# Altium PCB LED_Cube.PcbDoc (part 1 of 2)
Units mil, origin at the board's own origin, x right, y up, seen from the top; angles counter-clockwise.
Board outline 3937.01 x 3149.61 mil, 4 copper layers (Top Layer, Layer 1, Layer 2, Bottom Layer), stack 61.811 mil thick; 84 components, 132 nets, 410 pads, 91 vias.
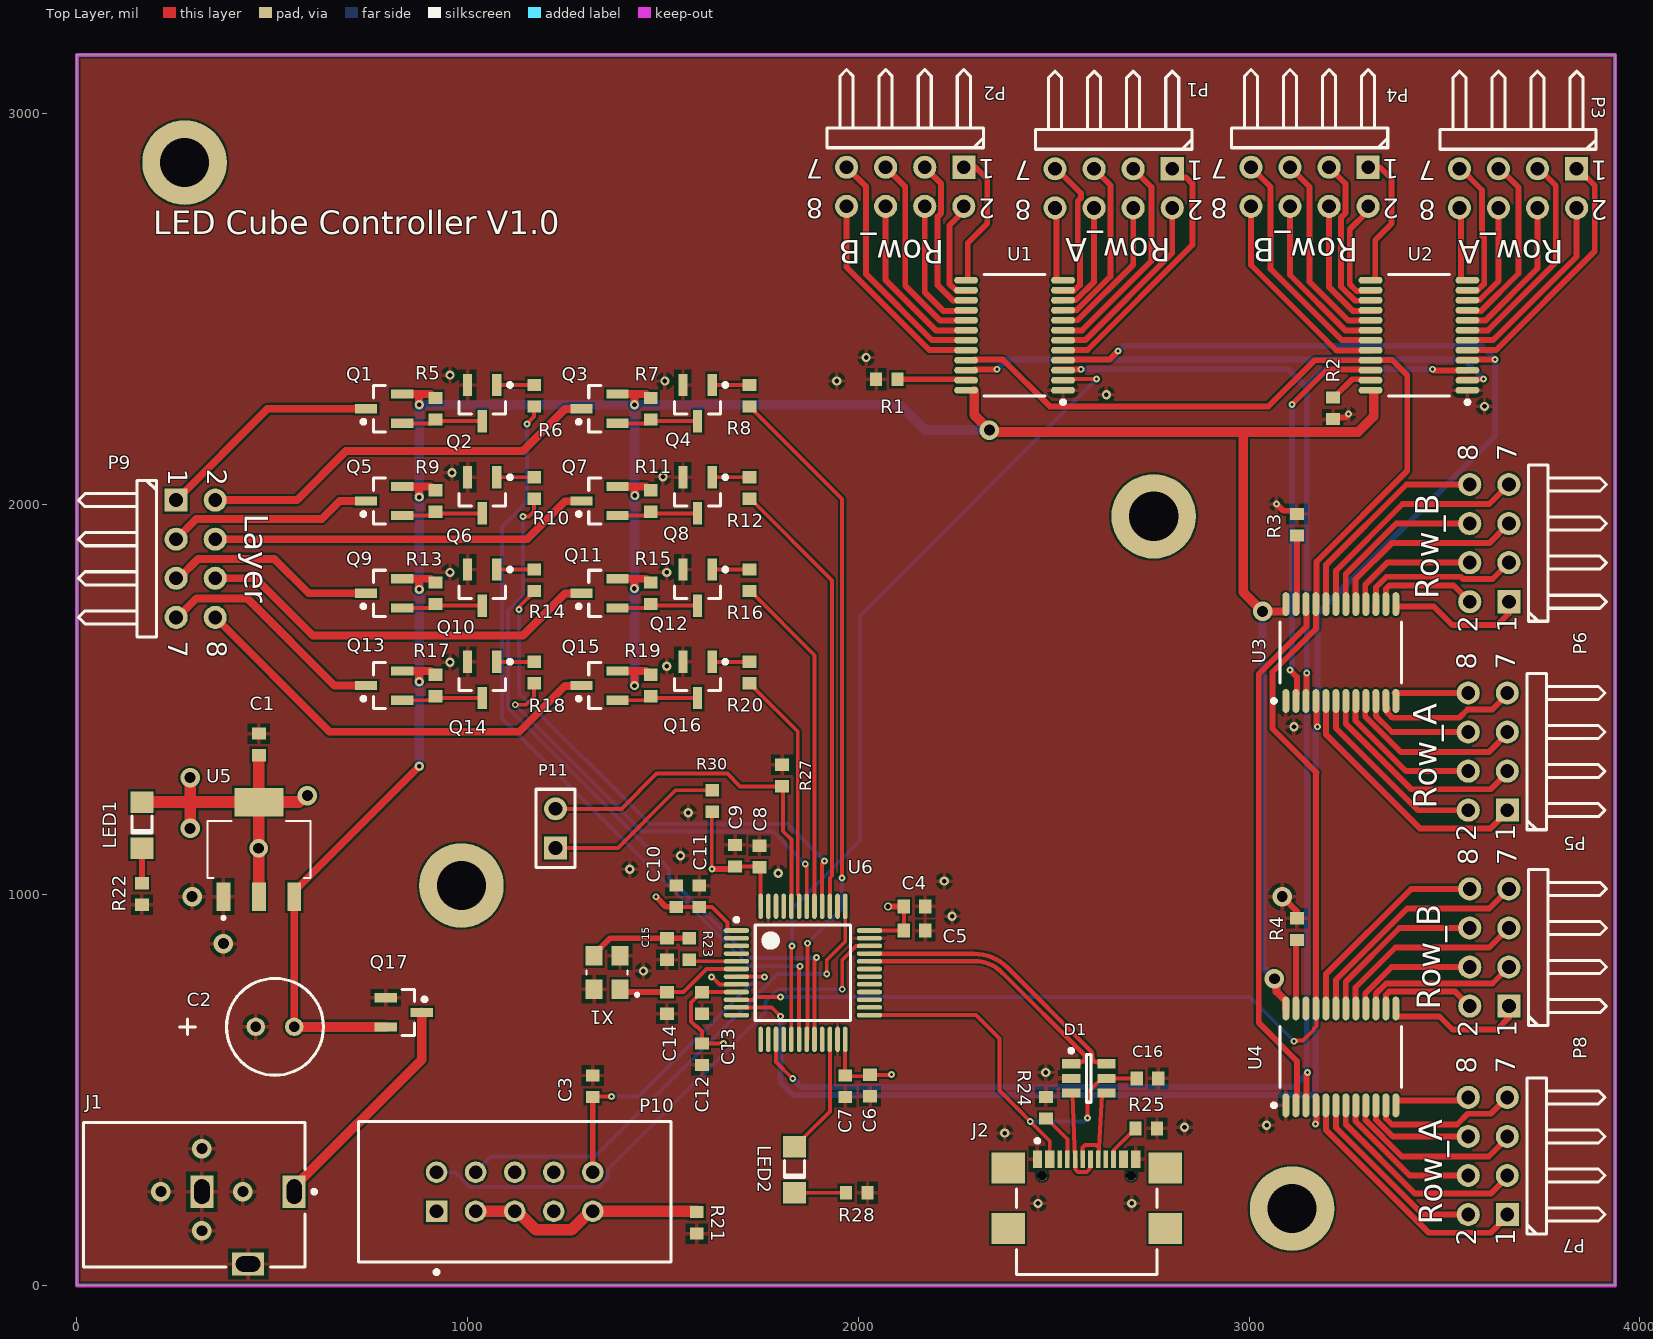
[diagram p0: Top Layer view]
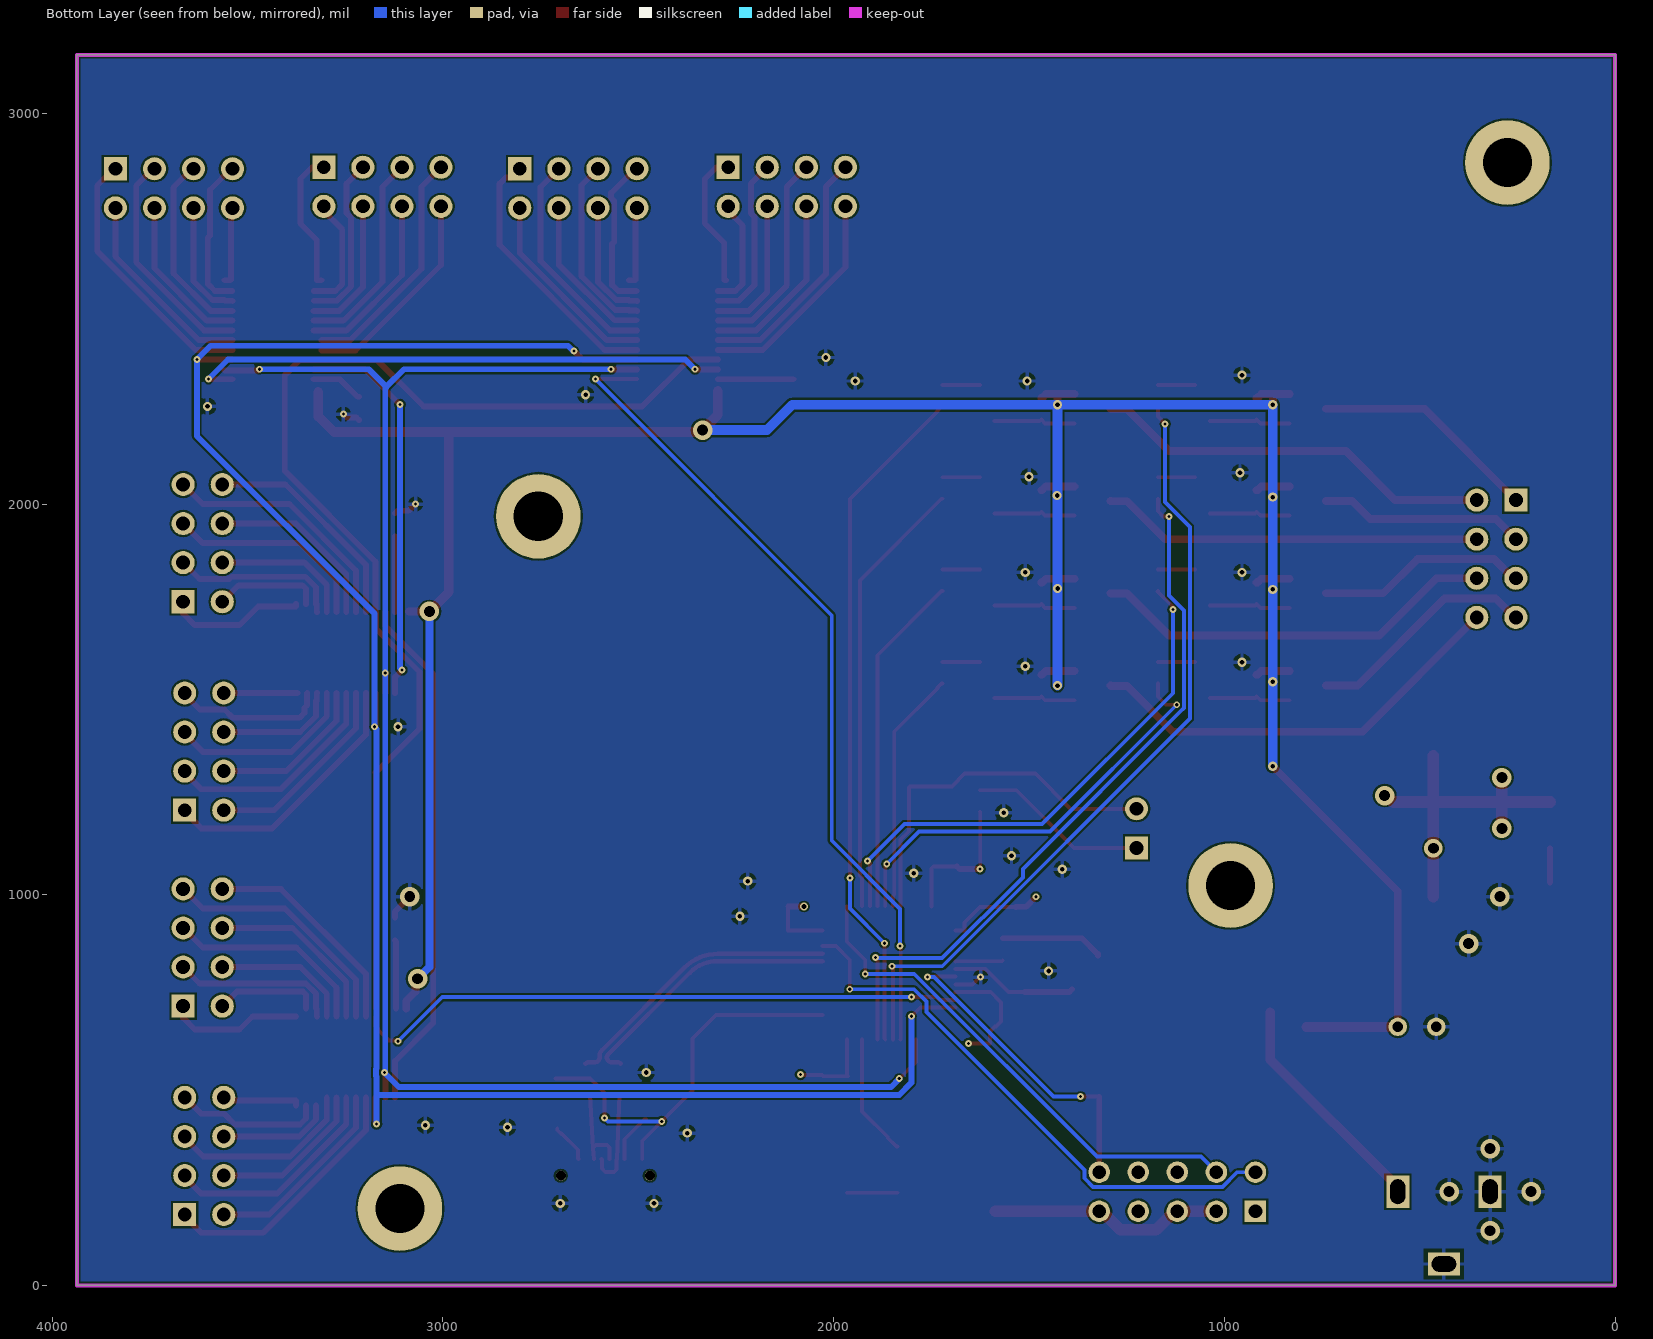
[diagram p1: Bottom Layer view, seen from below]
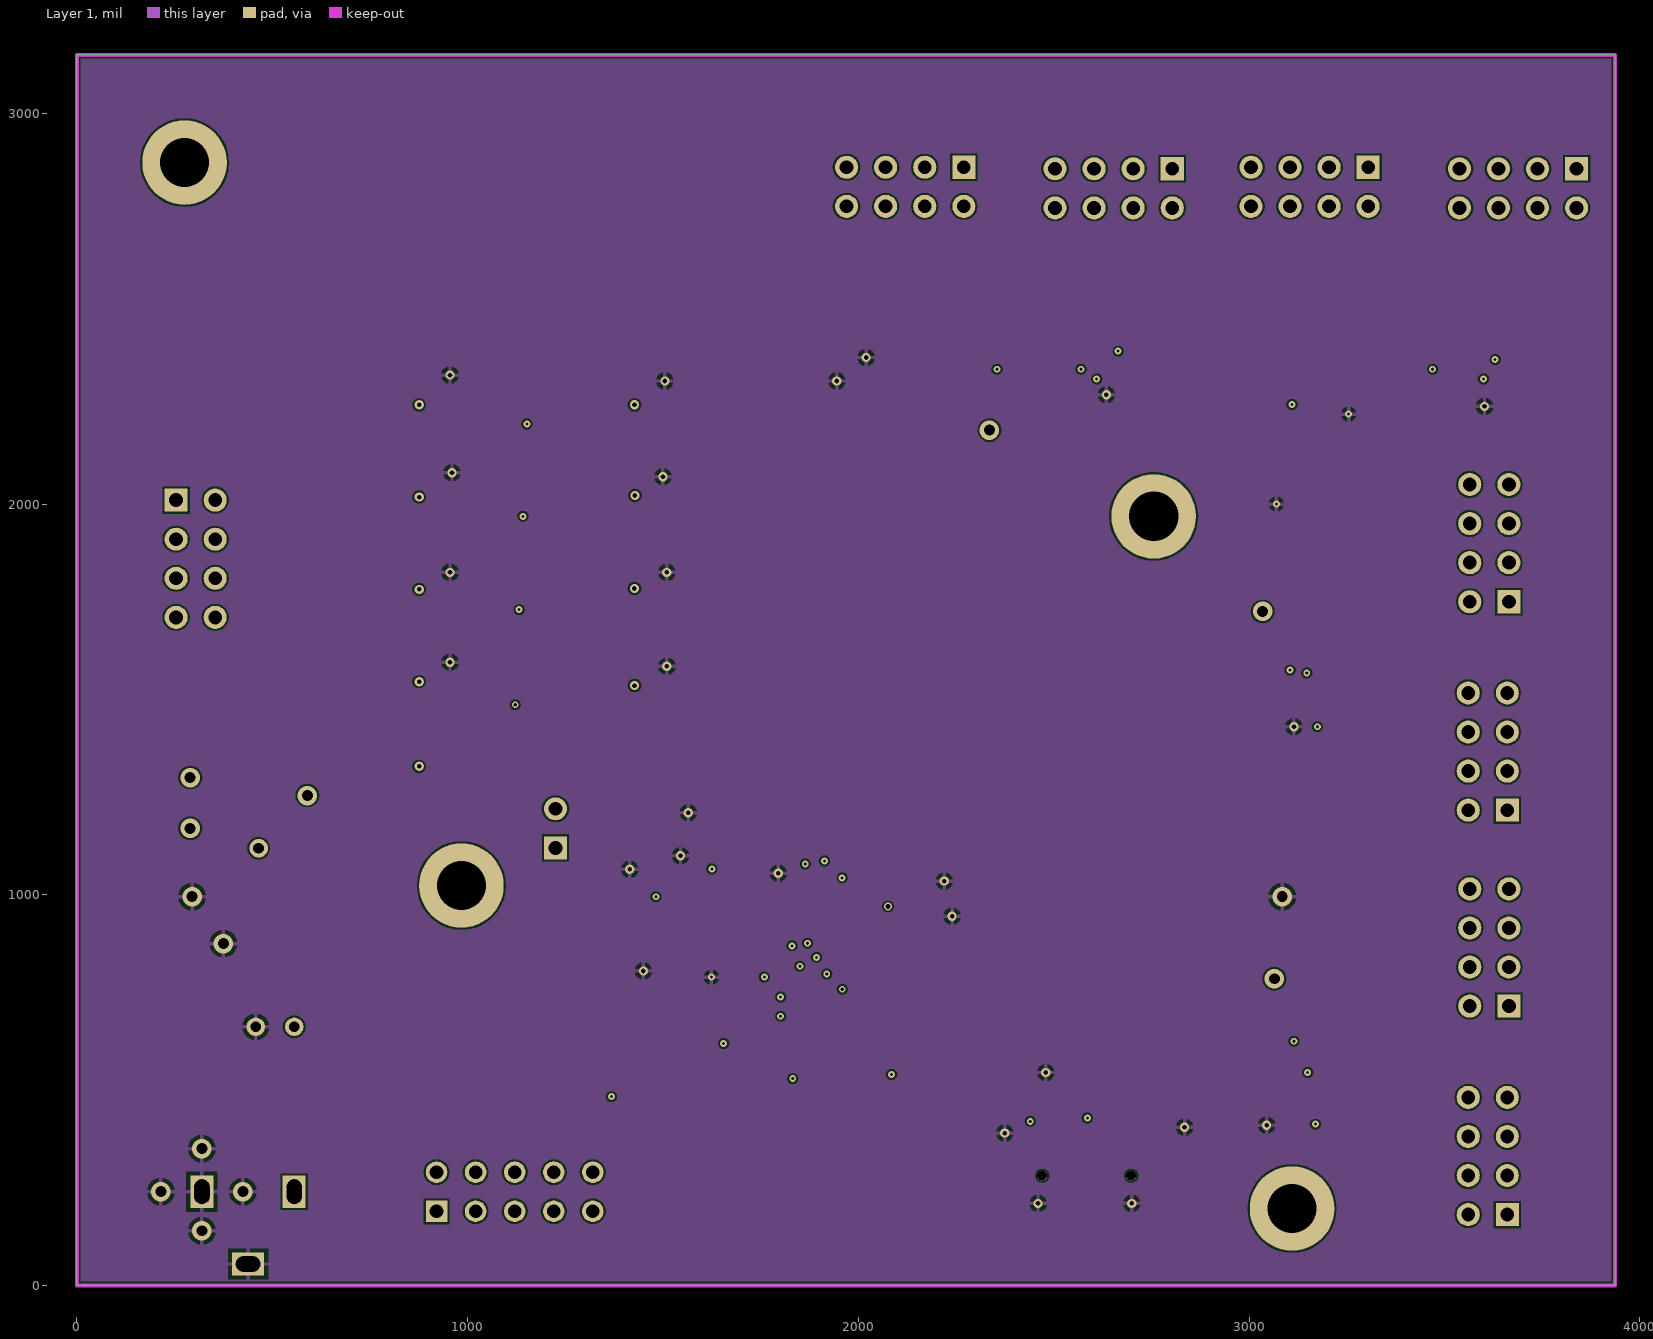
[diagram p2: Layer 1]
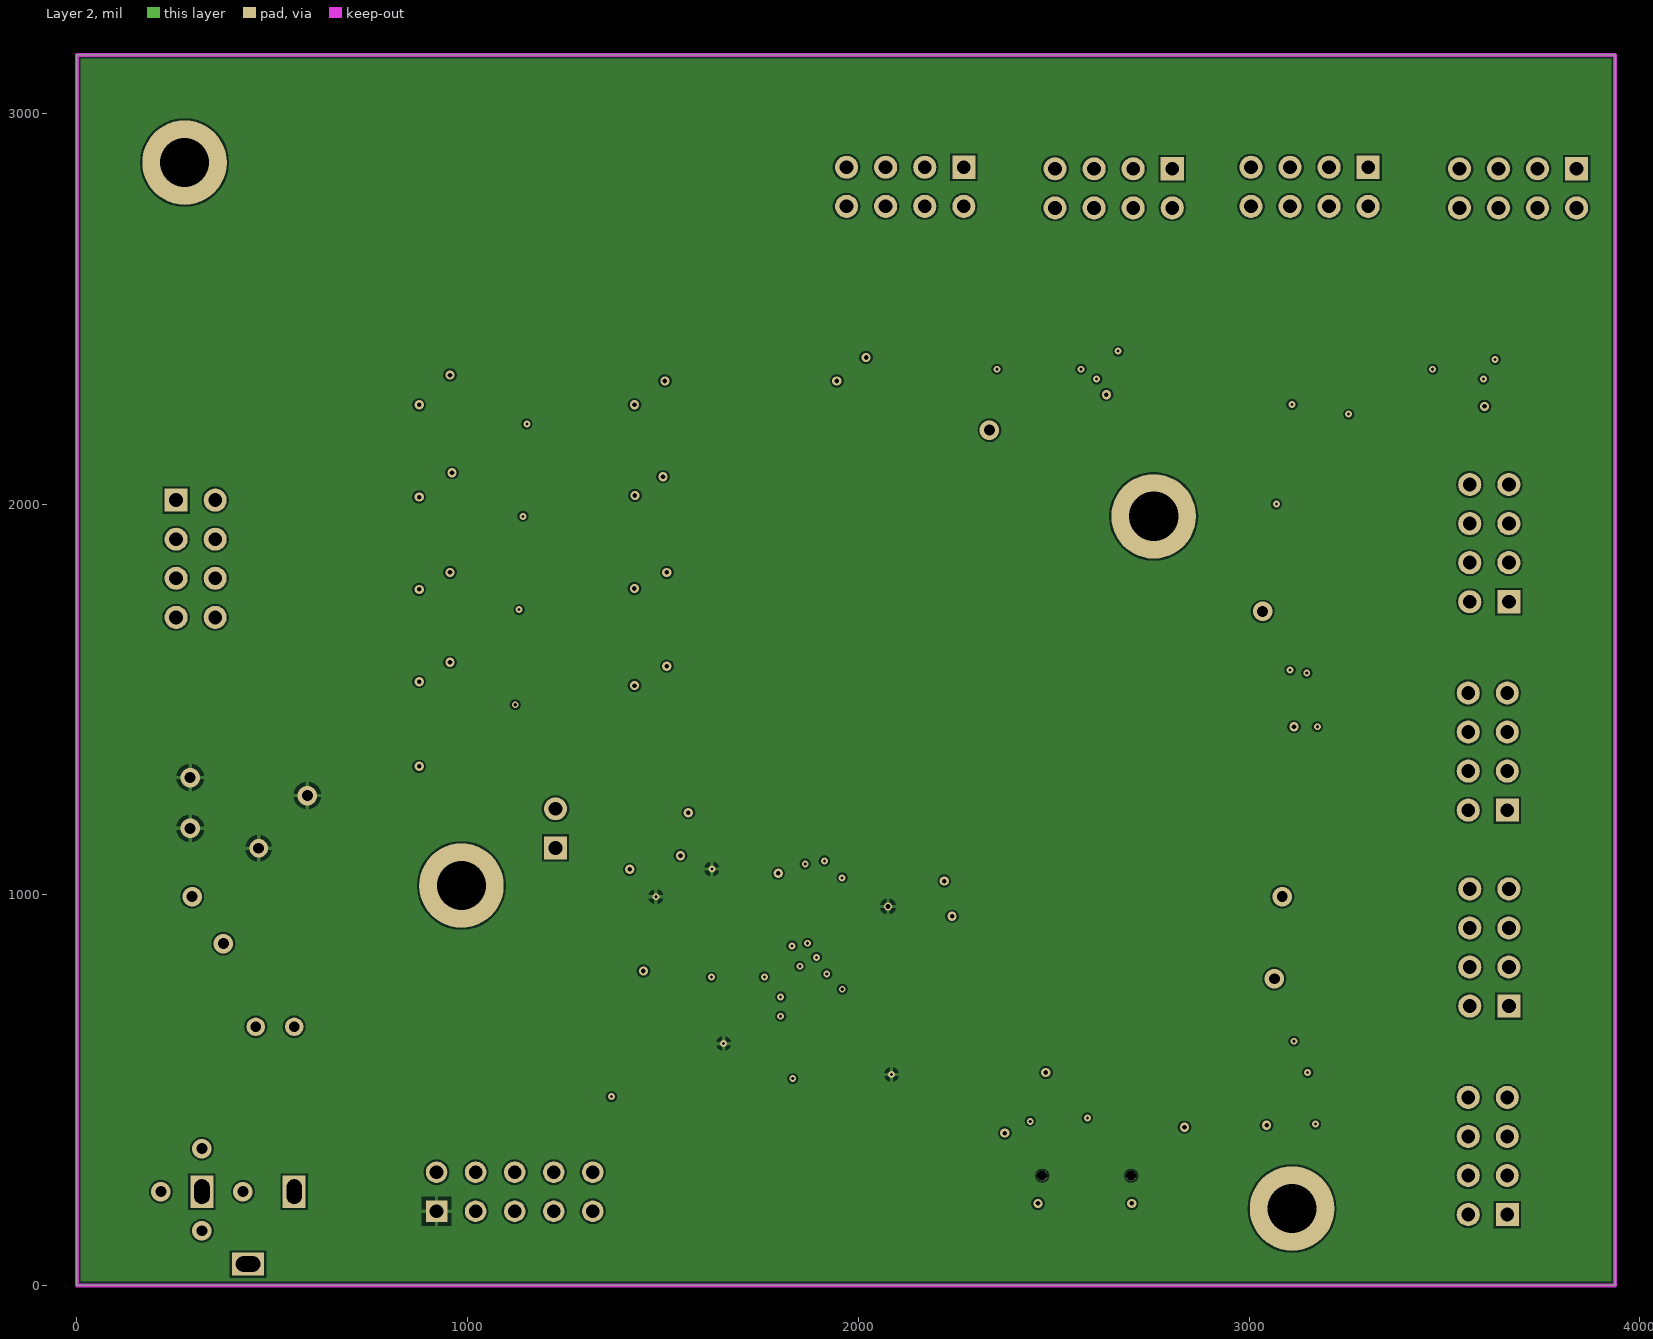
[diagram p3: Layer 2]

## Layer stack, top to bottom
Top Solder: solder mask 0.5, Solder Resist, Dk 3.5
Top Layer: signal copper 1.378
Dielectric 2: prepreg 7.874, PP-006, Dk 4.6
Layer 1: signal copper 0.689
Dielectric 1: dielectric 41.929, FR-4, Dk 4.8
Layer 2: signal copper 0.689
Dielectric 3: prepreg 7.874, PP-006, Dk 4.6
Bottom Layer: signal copper 1.378
Bottom Solder: solder mask 0.5, Solder Resist, Dk 3.5

## Board outline
0,0 0,3149.61 3937.01,3149.61 3937.01,0

## Design rules (kind name [scope] priority, off if disabled: settings)
Clearance [All] p1: gap=5 ignorepadtopadclearanceinfootprint=FALSE
DiffPairsRouting "Schematic Differential Pairs Routing_3" [InNet('USBD_N')] p1: maxlimit=10 minlimit=4 mostfreqgap=10 toplayer_mingap=6 toplayer_maxgap=8 toplayer_prefgap=7 toplayer_minwidth=11.57 toplayer_maxwidth=11.57 toplayer_prefwidth=11.57 midlayer1_mingap=5.78 midlayer1_prefgap=5.78 midlayer1_minwidth=6 midlayer1_maxwidth=15 midlayer1_prefwidth=6 impedanceprofiledriven=TRUE impedanceprofileid={0C0BFAF7-AAB6-4284-B5D2-A8A08F4A9567} impedanceprofilevalue=90.000000 maxuncoupledlength=500
DiffPairsRouting "Schematic Differential Pairs Routing_2" [InNet('USBD_P')] p2: maxlimit=10 minlimit=4 mostfreqgap=10 toplayer_mingap=6 toplayer_maxgap=8 toplayer_prefgap=7 toplayer_minwidth=11.57 toplayer_maxwidth=11.57 toplayer_prefwidth=11.57 midlayer1_mingap=5.78 midlayer1_prefgap=5.78 midlayer1_minwidth=6 midlayer1_maxwidth=15 midlayer1_prefwidth=6 impedanceprofiledriven=TRUE impedanceprofileid={0C0BFAF7-AAB6-4284-B5D2-A8A08F4A9567} impedanceprofilevalue=90.000000 maxuncoupledlength=500
DiffPairsRouting [All] p3: maxlimit=10 minlimit=10 mostfreqgap=10 toplayer_minwidth=15 toplayer_maxwidth=15 toplayer_prefwidth=15 midlayer1_minwidth=15 midlayer1_maxwidth=15 midlayer1_prefwidth=15 midlayer2_minwidth=15 midlayer2_maxwidth=15 midlayer2_prefwidth=15 bottomlayer_minwidth=15 bottomlayer_maxwidth=15 bottomlayer_prefwidth=15 maxuncoupledlength=500
HoleSize [All] p1: absolutevalues=TRUE maxlimit=248.03 minlimit=0.98 maxpercent=80.000 minpercent=20.000
HoleToHoleClearance [All] p1: gap=19.68 allowstackedmicrovias=TRUE
PolygonConnect [All] p1: connectstyle=Relief reliefconductorwidth=10 reliefentries=4 polygonreliefangle="90 Angle" airgapwidth=10
RoomDefinition HsDrv2 [InComponentClass('HsDrv2')] p1: confinementstyle=ConfineIn formatcopy=TRUE lockcomponents=FALSE outline 1220.47,2125.98 1771.65,2125.98 1771.65,2362.2 1220.47,2362.2
RoomDefinition HsDrv4 [InComponentClass('HsDrv4')] p2: confinementstyle=ConfineIn formatcopy=TRUE lockcomponents=FALSE outline 1220.47,1889.76 1771.65,1889.76 1771.65,2125.98 1220.47,2125.98
RoomDefinition HsDrv3 [InComponentClass('HsDrv3')] p3: confinementstyle=ConfineIn formatcopy=TRUE lockcomponents=FALSE outline 669.29,1889.76 1220.47,1889.76 1220.47,2125.98 669.29,2125.98
RoomDefinition HsDrv6 [InComponentClass('HsDrv6')] p4: confinementstyle=ConfineIn formatcopy=TRUE lockcomponents=FALSE outline 1220.47,1653.54 1771.65,1653.54 1771.65,1889.76 1220.47,1889.76
RoomDefinition HsDrv5 [InComponentClass('HsDrv5')] p5: confinementstyle=ConfineIn formatcopy=TRUE lockcomponents=FALSE outline 669.29,1653.54 1220.47,1653.54 1220.47,1889.76 669.29,1889.76
RoomDefinition HsDrv8 [InComponentClass('HsDrv8')] p6: confinementstyle=ConfineIn formatcopy=TRUE lockcomponents=FALSE outline 1220.47,1417.32 1771.65,1417.32 1771.65,1653.54 1220.47,1653.54
RoomDefinition HsDrv7 [InComponentClass('HsDrv7')] p7: confinementstyle=ConfineIn formatcopy=TRUE lockcomponents=FALSE outline 669.29,1417.32 1220.47,1417.32 1220.47,1653.54 669.29,1653.54
RoomDefinition HsDrv1 [InComponentClass('HsDrv1')] p8: confinementstyle=ConfineIn formatcopy=TRUE lockcomponents=FALSE outline 669.29,2125.98 1220.47,2125.98 1220.47,2362.2 669.29,2362.2
RoomDefinition Drv2 [InComponentClass('Drv2')] p9: confinementstyle=ConfineIn formatcopy=TRUE lockcomponents=FALSE outline 3935,3132.01 2900,3132.01 2900,2155 3935,2155
RoomDefinition Drv1 [InComponentClass('Drv1')] p10: confinementstyle=ConfineIn formatcopy=TRUE lockcomponents=FALSE outline 2900,3132.01 1865,3132.01 1865,2155 2900,2155
RoomDefinition Drv3 [InComponentClass('Drv3')] p11: confinementstyle=ConfineIn formatcopy=TRUE lockcomponents=FALSE outline 3935,1120 3935,2155 2957.99,2155 2957.99,1120
RoomDefinition Drv4 [InComponentClass('Drv4')] p12: confinementstyle=ConfineIn formatcopy=TRUE lockcomponents=FALSE outline 3935,85 3935,1120 2957.99,1120 2957.99,85
RoutingVias [All] p1: holewidth=11.81 width=19.68 viastyle="Through Hole" minholewidth=7.87 minwidth=17.72 maxholewidth=28 maxwidth=50
SolderMaskExpansion [All] p1: expansion=1 istentingtop=FALSE
Width "Schematic Width Constraint_17" [InNet('Layer5')] p1: maxlimit=39.37 minlimit=15 preferedwidth=39.37 midlayer1_minwidth=39.37 midlayer2_minwidth=39.37 minimp=50.000000 maximp=50.000000 favimp=50.000000
Width "Schematic Width Constraint_16" [InNet('Layer7')] p2: maxlimit=39.37 minlimit=15 preferedwidth=39.37 midlayer1_minwidth=39.37 midlayer2_minwidth=39.37 minimp=50.000000 maximp=50.000000 favimp=50.000000
Width "Schematic Width Constraint_4" [InNet('Layer0')] p3: maxlimit=39.37 minlimit=15 preferedwidth=39.37 midlayer1_minwidth=39.37 midlayer2_minwidth=39.37 minimp=50.000000 maximp=50.000000 favimp=50.000000
Width "Schematic Width Constraint_3" [InNet('Layer1')] p4: maxlimit=39.37 minlimit=15 preferedwidth=39.37 midlayer1_minwidth=39.37 midlayer2_minwidth=39.37 minimp=50.000000 maximp=50.000000 favimp=50.000000
Width "Schematic Width Constraint_2" [InNet('Layer2')] p5: maxlimit=39.37 minlimit=15 preferedwidth=39.37 midlayer1_minwidth=39.37 midlayer2_minwidth=39.37 minimp=50.000000 maximp=50.000000 favimp=50.000000
Width "Schematic Width Constraint_1" [InNet('Layer3')] p6: maxlimit=39.37 minlimit=15 preferedwidth=39.37 midlayer1_minwidth=39.37 midlayer2_minwidth=39.37 minimp=50.000000 maximp=50.000000 favimp=50.000000
Width "Schematic Width Constraint" [InNet('Layer6')] p7: maxlimit=39.37 minlimit=20 preferedwidth=39.37 midlayer1_minwidth=39.37 midlayer2_minwidth=39.37 minimp=50.000000 maximp=50.000000 favimp=50.000000
Width "Schematic Width Constraint_15" [InNet('Layer5')] p8: maxlimit=39.37 minlimit=20 preferedwidth=39.37 midlayer1_minwidth=39.37 midlayer2_minwidth=39.37 minimp=50.000000 maximp=50.000000 favimp=50.000000
Width "Schematic Width Constraint_14" [InNet('Layer7')] p9: maxlimit=39.37 minlimit=20 preferedwidth=39.37 midlayer1_minwidth=39.37 midlayer2_minwidth=39.37 minimp=50.000000 maximp=50.000000 favimp=50.000000
Width "Schematic Width Constraint_13" [InNet('Layer0')] p10: maxlimit=39.37 minlimit=20 preferedwidth=39.37 midlayer1_minwidth=39.37 midlayer2_minwidth=39.37 minimp=50.000000 maximp=50.000000 favimp=50.000000
Width "Schematic Width Constraint_12" [InNet('Layer1')] p11: maxlimit=39.37 minlimit=20 preferedwidth=39.37 midlayer1_minwidth=39.37 midlayer2_minwidth=39.37 minimp=50.000000 maximp=50.000000 favimp=50.000000
Width "Schematic Width Constraint_11" [InNet('Layer2')] p12: maxlimit=39.37 minlimit=20 preferedwidth=39.37 midlayer1_minwidth=39.37 midlayer2_minwidth=39.37 minimp=50.000000 maximp=50.000000 favimp=50.000000
Width "Schematic Width Constraint_10" [InNet('Layer3')] p13: maxlimit=39.37 minlimit=20 preferedwidth=39.37 midlayer1_minwidth=39.37 midlayer2_minwidth=39.37 minimp=50.000000 maximp=50.000000 favimp=50.000000
Width "Schematic Width Constraint_9" [InNet('VCC')] p14: maxlimit=59.06 minlimit=17 preferedwidth=40 midlayer1_minwidth=39.37 midlayer1_prefwidth=39.37 midlayer2_minwidth=39.37 midlayer2_prefwidth=39.37 minimp=50.000000 maximp=50.000000 favimp=50.000000
Width "Schematic Width Constraint_8" [InNet('NetJ1_1')] p15: maxlimit=59.06 minlimit=17 preferedwidth=40 midlayer1_minwidth=39.37 midlayer1_prefwidth=39.37 midlayer2_minwidth=39.37 midlayer2_prefwidth=39.37 minimp=50.000000 maximp=50.000000 favimp=50.000000
Width "Schematic Width Constraint_7" [InNet('Layer4')] p16: maxlimit=39.37 minlimit=27.56 preferedwidth=39.37 midlayer1_minwidth=39.37 midlayer2_minwidth=39.37 minimp=50.000000 maximp=50.000000 favimp=50.000000
Width "Schematic Width Constraint_6" [InNet('Layer5')] p17: maxlimit=39.37 minlimit=27.56 preferedwidth=39.37 midlayer1_minwidth=39.37 midlayer2_minwidth=39.37 minimp=50.000000 maximp=50.000000 favimp=50.000000
Width [All] p18: maxlimit=30 minlimit=10 preferedwidth=15
27 further rules are at their usual default settings.

## Classes and differential pairs
polygon class PolygonClass_1: NONET_L01_P004
channel class HighSideDriver: HsDrv1 HsDrv2 HsDrv3 HsDrv4 HsDrv5 HsDrv6 HsDrv7 HsDrv8
channel class Driver: Drv1 Drv2 Drv3 Drv4
net class HS[0..7]: HS0 HS1 HS2 HS3 HS4 HS5 HS6 HS7
component class Drv3: P P5 P6 R R3 U U3
component class Drv2: P P3 P4 R R2 U U2
component class Drv1: P P1 P2 R R1 U U1
component class Drv4: P P7 P8 R R4 U U4
component class HsDrv8: Q15 Q16 R R19 R20
component class HsDrv7: Q13 Q14 R R17 R18
component class HsDrv6: Q11 Q12 R R15 R16
component class HsDrv5: Q9 Q10 R R13 R14
component class HsDrv4: Q7 Q8 R R11 R12
component class HsDrv3: Q5 Q6 R R9 R10
component class HsDrv2: Q3 Q4 R R7 R8
component class HsDrv1: Q1 Q2 R R5 R6
differential pair USBD: +USBD_P -USBD_N

## Components (designator, comment, footprint, x,y, rotation, side; value= is the part's Value field where it differs from the comment)
C1 "Cap" 1608[0603] 465.67,1385 r270 top value=1uF
C2 "Cap Pol3" 2.5mmCap 556.22,662 r180 top value=47uF
C3 "Cap Semi" 1608[0603] 1320.49,509.87 r270 top value=100nF (schematic designator C15)
C4 "Cap Semi" 1608[0603] 2144,970.28 r180 top value=1uF (schematic designator C3)
C5 "Cap Semi" 1608[0603] 2144,908.27 r180 top value=10nF (schematic designator C4)
C6 "Cap Semi" 1608[0603] 2030.06,511.5 r90 top value=1uF (schematic designator C5)
C7 "Cap Semi" 1608[0603] 1966.54,509.87 r90 top value=10nF (schematic designator C6)
C8 "Cap Semi" 1608[0603] 1746.73,1098 r270 top value=1uF (schematic designator C7)
C9 "Cap Semi" 1608[0603] 1684.72,1099.97 r270 top value=10nF (schematic designator C8)
C10 "Cap Semi" 1608[0603] 1534.01,996 r270 top value=1uF (schematic designator C9)
C11 "Cap Semi" 1608[0603] 1593,996 r270 top value=10nF (schematic designator C10)
C12 "Cap Semi" 1608[0603] 1600,591.97 r90 top value=1uF (schematic designator C11)
C13 "Cap Semi" 1608[0603] 1600,723.23 r90 top value=10nF (schematic designator C12)
C14 "Cap Semi" 1608[0603] 1510,723.23 r90 top value=100pF (schematic designator C13)
C15 "Cap Semi" 1608[0603] 1510,861.02 r90 top value=100pF (schematic designator C14)
C16 "Cap Semi" 1608[0603] 2740,530 r180 top value=22uF
D1 "USBLC6-2SC6" STM-SOT23-6L_V 2590,530 r0 top
J1 "PJ-102B" CUI-PJ-102B_V 438.11,239.95 r180 top
J2 "USB4110-GF-A" FP-USB4110-GF-A-MFG 2584.4,178.46 r0 top
LED1 "150120BS75000" 1206_A 166.34,1178.17 r90 top
LED2 "150120BS75000" 1206_A 1837.17,296.29 r90 top
P1 "Row_A" HDR2X4H 2803.54,2858.1 r180 top
P2 "Row_B" HDR2X4H 2270,2862.01 r180 top
P3 "Row_A" HDR2X4H 3838.54,2858.1 r180 top (schematic designator P1)
P4 "Row_B" HDR2X4H 3305,2862.01 r180 top (schematic designator P2)
P5 "Row_A" HDR2X4H 3661.09,1216.46 r90 top (schematic designator P1)
P6 "Row_B" HDR2X4H 3665,1750 r90 top (schematic designator P2)
P7 "Row_A" HDR2X4H 3661.09,181.46 r90 top (schematic designator P1)
P8 "Row_B" HDR2X4H 3665,715 r90 top (schematic designator P2)
P9 "Layer" HDR2X4H 254,2010 r270 top (schematic designator P4)
P10 "5103308-1" TECO-5103308-1_V 1120.49,239.87 r0 top (schematic designator P3)
P11 "Header 2" HDR1X2 1225,1120 r90 top (schematic designator P5)
Q1 "MOSFET-P" SOT23_M 786.47,2243.98 r180 top
Q2 "NPN" SOT-23B_M 1037.47,2258.55 r270 top
Q3 "MOSFET-P" SOT23_M 1337.65,2243.98 r180 top (schematic designator Q1)
Q4 "NPN" SOT-23B_M 1588.65,2258.55 r270 top (schematic designator Q2)
Q5 "MOSFET-P" SOT23_M 786.47,2007.76 r180 top (schematic designator Q1)
Q6 "NPN" SOT-23B_M 1037.47,2022.33 r270 top (schematic designator Q2)
Q7 "MOSFET-P" SOT23_M 1337.65,2007.76 r180 top (schematic designator Q1)
Q8 "NPN" SOT-23B_M 1588.65,2022.33 r270 top (schematic designator Q2)
Q9 "MOSFET-P" SOT23_M 786.47,1771.54 r180 top (schematic designator Q1)
Q10 "NPN" SOT-23B_M 1037.47,1786.11 r270 top (schematic designator Q2)
Q11 "MOSFET-P" SOT23_M 1337.65,1771.54 r180 top (schematic designator Q1)
Q12 "NPN" SOT-23B_M 1588.65,1786.11 r270 top (schematic designator Q2)
Q13 "MOSFET-P" SOT23_M 786.47,1535.32 r180 top (schematic designator Q1)
Q14 "NPN" SOT-23B_M 1037.47,1549.89 r270 top (schematic designator Q2)
Q15 "MOSFET-P" SOT23_M 1337.65,1535.32 r180 top (schematic designator Q1)
Q16 "NPN" SOT-23B_M 1588.65,1549.89 r270 top (schematic designator Q2)
Q17 "MOSFET-P" SOT23_M 836.61,698.82 r0 top (schematic designator Q3)
R1 "Res3" 1608[0603] 2073,2319.51 r0 top value=1K
R2 "Res3" 1608[0603] 3215,2245 r90 top value=1K (schematic designator R1)
R3 "Res3" 1608[0603] 3122.5,1947 r270 top value=1K (schematic designator R1)
R4 "Res3" 1608[0603] 3122.5,912 r270 top value=1K (schematic designator R1)
R5 "Res3" 1608[0603] 917.47,2243.98 r90 top value=1M (schematic designator R3)
R6 "Res3" 1608[0603] 1170.47,2277.25 r270 top value=1K (schematic designator R4)
R7 "Res3" 1608[0603] 1468.65,2243.98 r90 top value=1M (schematic designator R3)
R8 "Res3" 1608[0603] 1721.65,2277.25 r270 top value=1K (schematic designator R4)
R9 "Res3" 1608[0603] 917.47,2007.76 r90 top value=1M (schematic designator R3)
R10 "Res3" 1608[0603] 1170.47,2041.03 r270 top value=1K (schematic designator R4)
R11 "Res3" 1608[0603] 1468.65,2007.76 r90 top value=1M (schematic designator R3)
R12 "Res3" 1608[0603] 1721.65,2041.03 r270 top value=1K (schematic designator R4)
R13 "Res3" 1608[0603] 917.47,1771.54 r90 top value=1M (schematic designator R3)
R14 "Res3" 1608[0603] 1170.47,1804.81 r270 top value=1K (schematic designator R4)
R15 "Res3" 1608[0603] 1468.65,1771.54 r90 top value=1M (schematic designator R3)
R16 "Res3" 1608[0603] 1721.65,1804.81 r270 top value=1K (schematic designator R4)
R17 "Res3" 1608[0603] 917.47,1535.32 r90 top value=1M (schematic designator R3)
R18 "Res3" 1608[0603] 1170.47,1568.59 r270 top value=1K (schematic designator R4)
R19 "Res3" 1608[0603] 1468.65,1535.32 r90 top value=1M (schematic designator R3)
R20 "Res3" 1608[0603] 1721.65,1568.59 r270 top value=1K (schematic designator R4)
R21 "Res3" 1608[0603] 1586.49,160.35 r90 top value=10k (schematic designator R2)
R22 "Res3" 1608[0603] 166.34,1002.23 r90 top value=330 (schematic designator R9)
R23 "Res3" 1608[0603] 1567.25,861.06 r270 top value=1K (schematic designator R5)
R24 "Res3" 1608[0603] 2480,455 r270 top value=1k (schematic designator R6)
R25 "Res3" 1608[0603] 2737,402 r180 top value=1k (schematic designator R7)
R27 "Res3" 1608[0603] 1805,1305 r270 top value=10k (schematic designator R10)
R28 "Res3" 1608[0603] 1996.06,237.24 r180 top value=330 (schematic designator R8)
R30 "Res3" 1608[0603] 1626.06,1240 r270 top value=1k (schematic designator R13)
U1 "STP16CPC26PTR" TSOP65P700X110_HS-25N 2400,2432.01 r180 top (schematic designator U)
U2 "STP16CPC26PTR" TSOP65P700X110_HS-25N 3435,2432.01 r180 top (schematic designator U)
U3 "STP16CPC26PTR" TSOP65P700X110_HS-25N 3235,1620 r90 top (schematic designator U)
U4 "STP16CPC26PTR" TSOP65P700X110_HS-25N 3235,585 r90 top (schematic designator U)
U5 "AZ1117EH-3.3TRG1" SOT230P700X180-4N 465.67,1116.17 r90 top (schematic designator U2)
U6 "STM32F070C6T6" STM-LQFP48_M 1858.27,800.2 r0 top (schematic designator U1)
X1 "ABM3B-12.000MHZ-B2-T" *OSCCC320X250X60 1356.93,801.09 r180 top

## Footprints (in the part's own frame and the unit in brackets; to place one, negate y for a bottom-side part, rotate by r counter-clockwise, add the part's x,y. Pads: shape width x height; smd on the part's side, far side on the other; paste and mask are expansions set on the pad)
2.5mmCap [mm]
  round 1.2 hole 0.7: 1(0,0) 2(2.5,0)
  silkscreen extent -1.9,-3.15 7.45,3.15
1206_A [mm] "Chip LED, 2-Leads, Body 3.2x1.6mm, IPC Medium Density"
  rect 1.4x1.5 smd: 1(-1.5,0) 2(1.5,0)
  silkscreen extent -0.5,-0.66 0.6,0.65, body extent -1.6,-0.8 1.6,0.8, height 0.68
1608[0603] [mm] "Chip Capacitor, Body 1.6x0.8mm, IPC High Density"
  rect 0.8x0.9 smd: 1(-0.7,0) 2(0.7,0)
  body extent -0.87,-0.48 0.87,0.48, height 1.3
*OSCCC320X250X60 [mm]
  rect 1.09x1.29 smd: 1(-0.84,1.09) 2(-0.84,-1.09) 3(0.84,-1.09) 4(0.84,1.09)
  silkscreen extent -2.05,-0.13 1.33,1.55
CUI-PJ-102B_V [mm] "THD, 3-Leads, Body 14.4x9mm, Height 11mm"
  rect 1.5x2.1 hole 1 slot 1.6 at 90 deg: 1(-3,0) 2(3,0)
  rect 2.1x1.5 hole 1 slot 1.6 at 0 deg: 3(0,4.7)
  silkscreen extent -4.43,-4.5 10.7,4.9, body extent -3.7,-4.5 10.7,4.9, height 11
FP-USB4110-GF-A-MFG [mm]
  rect 2.18x2 smd paste+0 mask+0: 1(-5.11,3.105) 2(5.11,3.105) 3(-5.11,-0.825) 4(5.11,-0.825)
  rect 0.6x1.15 smd paste+0 mask+0: A1-B12(-3.2,3.68) A4-B9(-2.4,3.68) B1-A12(3.2,3.68) B4-A9(2.4,3.68)
  rect 0.3x1.15 smd paste+0 mask+0: A5(-1.25,3.68) A6(-0.25,3.68) A7(0.25,3.68) A8(1.25,3.68) B5(1.75,3.68) B6(0.75,3.68) B7(-0.75,3.68) B8(-1.75,3.68)
  round 0.65 hole 0.65 unplated paste-1000 mask+0: ""(-2.89,2.605) ""(2.89,2.605)
  silkscreen extent -4.57,-3.83 4.57,4.99, body extent -6.3,-3.92 6.3,4.36, height 0.25
HDR1X2 [mm] "Connector; Header; 2 Position"
  rect 1.5x1.5 hole 0.9: 1(0,0)
  round 1.5 hole 0.9: 2(2.54,0)
  silkscreen extent -1.27,-1.27 3.81,1.27
HDR2X4H [mm] "Connector; Header; 4x2 Position; Right Angle"
  rect 1.5x1.5 hole 0.9: 1(0,0)
  round 1.5 hole 0.9: 2(0,2.54) 3(2.54,0) 4(2.54,2.54) 5(5.08,0) 6(5.08,2.54) 7(7.62,0) 8(7.62,2.54)
  silkscreen extent -1.27,-6.35 8.89,-1.27
SOT23_M [mm] "SOT23, 3-Leads, Body 2.9x1.3mm, Pitch 0.95mm, Lead Span 2.3mm - Reverse Pinning, IPC Low Density"
  rect 1.45x0.6 smd: 1(1.175,0) 2(-1.175,-0.95) 3(-1.175,0.95)
  silkscreen extent -0.1,-1.5 1.47,1.5, body extent -0.7,-1.5 0.7,1.5, height 1.1
SOT230P700X180-4N [mm]
  rect 1.86x0.9 smd: 1(-3.075,2.3) 2(-3.075,0) 3(-3.075,-2.3)
  rect 1.86x3.19 smd: 4(3.075,0)
  silkscreen extent -4.55,-3.35 1.85,3.35
SOT-23B_M [mm] "SOT23, 3-Leads, Body 2.9x1.3mm, Pitch 0.95mm, Lead Span 2.4mm, IPC Low Density"
  rect 1.45x0.6 smd: 1(-1.175,0.95) 2(-1.175,-0.95) 3(1.175,0)
  silkscreen extent -1.3,-1.5 0.7,1.93, body extent -0.7,-1.5 0.7,1.5, height 1.14
STM-LQFP48_M [mm] "QFP, 48-Leads, Body 7x7mm, Pitch 0.5mm, IPC Low Density"
  oval 1.65x0.3 smd: 1(-4.325,2.75) 2(-4.325,2.25) 3(-4.325,1.75) 4(-4.325,1.25) 5(-4.325,0.75) 6(-4.325,0.25) 7(-4.325,-0.25) 8(-4.325,-0.75) 9(-4.325,-1.25) 10(-4.325,-1.75) 11(-4.325,-2.25) 12(-4.325,-2.75) 25(4.325,-2.75) 26(4.325,-2.25) 27(4.325,-1.75) 28(4.325,-1.25) 29(4.325,-0.75) 30(4.325,-0.25) 31(4.325,0.25) 32(4.325,0.75) 33(4.325,1.25) 34(4.325,1.75) 35(4.325,2.25) 36(4.325,2.75)
  oval 0.3x1.65 smd: 13(-2.75,-4.325) 14(-2.25,-4.325) 15(-1.75,-4.325) 16(-1.25,-4.325) 17(-0.75,-4.325) 18(-0.25,-4.325) 19(0.25,-4.325) 20(0.75,-4.325) 21(1.25,-4.325) 22(1.75,-4.325) 23(2.25,-4.325) 24(2.75,-4.325) 37(2.75,4.325) 38(2.25,4.325) 39(1.75,4.325) 40(1.25,4.325) 41(0.75,4.325) 42(0.25,4.325) 43(-0.25,4.325) 44(-0.75,4.325) 45(-1.25,4.325) 46(-1.75,4.325) 47(-2.25,4.325) 48(-2.75,4.325)
  silkscreen extent -4.45,-3.1 3.1,3.57, body extent -3.5,-3.5 3.5,3.5, height 1.6
STM-SOT23-6L_V [mm] "SOT23, 6-Leads, Body 3.05x1.75mm, Pitch 0.95mm"
  rect 1.2x0.6 smd: 1(-1.15,0.95) 2(-1.15,0) 3(-1.15,-0.95) 4(1.15,-0.95) 5(1.15,0) 6(1.15,0.95)
  silkscreen extent -1.27,-1.55 0.15,1.92, body extent -1.6,-1.53 1.6,1.53, height 1.45
TECO-5103308-1_V [mm] "Connector, 10-Leads, Body 20.32x9.14mm, Pitch 2.54mm"
  rect 1.4x1.4 hole 0.89: 1(-5.08,-1.27)
  round 1.4 hole 0.89: 2(-5.08,1.27) 3(-2.54,-1.27) 4(-2.54,1.27) 5(0,-1.27) 6(0,1.27) 7(2.54,-1.27) 8(2.54,1.27) 9(5.08,-1.27) 10(5.08,1.27)
  silkscreen extent -10.16,-5.34 10.16,4.57, body extent -10.16,-4.57 10.16,4.57, height 9.86
TSOP65P700X110_HS-25N [mm] "TSOP, 24-Leads, Body 7.80x4.40mm, Pitch 0.65mm, Thermal Pad 5.20x3.40mm, IPC Medium Density"
  oval 1.55x0.45 smd: 1(-3.15,3.575) 2(-3.15,2.925) 3(-3.15,2.275) 4(-3.15,1.625) 5(-3.15,0.975) 6(-3.15,0.325) 7(-3.15,-0.325) 8(-3.15,-0.975) 9(-3.15,-1.625) 10(-3.15,-2.275) 11(-3.15,-2.925) 12(-3.15,-3.575) 13(3.15,-3.575) 14(3.15,-2.925) 15(3.15,-2.275) 16(3.15,-1.625) 17(3.15,-0.975) 18(3.15,-0.325) 19(3.15,0.325) 20(3.15,0.975) 21(3.15,1.625) 22(3.15,2.275) 23(3.15,2.925) 24(3.15,3.575)
  silkscreen extent -3.27,-3.95 1.98,4.47, body extent -2.25,-3.95 2.25,3.95, height 1.1

## Part data
C1: "Capacitor", LatestRevisionDate=17-Jul-2002, LatestRevisionNote="Re-released for DXP Platform.", PackageDescription="Radial Cap, Thru-Hole; 2 Leads; 0.3 in Pin Spacing", PackageReference=RAD-0.3, Published=8-Jun-2000, Publisher="Altium Limited"
C2: "Polarized Capacitor (Surface Mount)", LatestRevisionDate=29-May-2009, LatestRevisionNote="IPC-7351 Footprint Added.", PackageDescription="Chip Capacitor", PackageReference=C0805, Published=8-Jun-2000, Publisher="Altium Limited"
C3 C16: library part "Cap Semi_3", "Capacitor (Semiconductor SIM Model)", LCSC Part #=C14663, LatestRevisionDate=29-May-2009, LatestRevisionNote="IPC-7351 Footprint Added.", PackageDescription="Chip Capacitor", PackageReference=C1206, Published=8-Jun-2000, Publisher="Altium Limited"
C4 C6 C8 C10 C12: library part "Cap Semi_1", "Capacitor (Semiconductor SIM Model)", LCSC Part #=C15849, LatestRevisionDate=29-May-2009, LatestRevisionNote="IPC-7351 Footprint Added.", PackageDescription="Chip Capacitor", PackageReference=C1206, Published=8-Jun-2000, Publisher="Altium Limited"
C5 C7 C9 C11 C13: library part "Cap Semi_2", "Capacitor (Semiconductor SIM Model)", LCSC Part #=C15195, LatestRevisionDate=29-May-2009, LatestRevisionNote="IPC-7351 Footprint Added.", PackageDescription="Chip Capacitor", PackageReference=C1206, Published=8-Jun-2000, Publisher="Altium Limited"
C14 C15: "Capacitor (Semiconductor SIM Model)", LatestRevisionDate=29-May-2009, LatestRevisionNote="IPC-7351 Footprint Added.", PackageDescription="Chip Capacitor", PackageReference=C1206, Published=8-Jun-2000, Publisher="Altium Limited"
D1: library part CMP-2000-05378-1, "Very low capacitance ESD protection, 3.5 pF, -40 to 125 degC, 6-Pin SOT23, RoHS, Tape and Reel", Capacitance Value=3.5pF, Clamping Voltage=17V, Leakage Current=0.15uA, Manufacturer=STMicroelectronics, Operating Temp Range=-40Cto125C, Operating Temperature Classification=Automotive, Operating Temperature Max Deg. C=125C, Operating Temperature Min Deg. C=-40C, Package / Case=SOT-23, Package Description="6-Pin Small Outline Transistor, Body 2.925 x 1.625 mm, Pitch 0.95 mm", Package Reference=SOT23-6L, Peak Pulse Current=5A, Reverse Breakdown Voltage=6V, Reverse Stand-off Voltage=5V, Test Current (It)=1mA, Clamping Voltage (Max)=17V, Configuration=Dual, Datasheet URL=http://www.st.com/st-web-ui/static/active/en/resource/technical/document/datasheet/CD00050750.pdf, Datasheet Version="Rev. 5, 10/2011", Direction Type=Uni-Directional, Leakage Current (Max)=0.15uA, Manufacturer URL=http://www.st.com/, Mounting=SurfaceMount, Mounting Style=SurfaceMount, Number of Elements=1, Packaging=TapeandReel, Pin Count=6, Polarity=Uni-Directional, Product Depth (mm)=1.75mm, Product Height (mm)=1.3mm, Product Length (mm)=3.05mm, Rad Hardened=No, Suppressor Type=DiodeArrays, Working Voltage=5V, Working Voltage (Max)=5V
J1: library part CMP-2000-06900-1, "Through Hole Right Angle DC Power Jack, 2.5 A, 2.5 mm Center Pin, 3 Position, -25 to 85 degC, RoHS, Bulk", Current Rating=2.5A, Flammability Rating=UL94V-0, Insulation Resistance=100MOhms, Manufacturer=CUIInc., Operating Temperature Range=-25Cto+85C, Package Description="3-Pin Through Hole Device, Body 14.4 x 9 mm, Height 11 mm", Voltage Rating=24V, Brand=CUI, Connector Type=DCPowerJack, Contact Gender=Male, Contact Material=Copper, Contact Plating=Nickel, Datasheet URL=http://www.cui.com/product/resource/pj-102b.pdf, Datasheet Version="Rev. 1.03, 04/2016", Factory Pack Quantity=280, Housing Material=PolybutyleneTerephthalate(PBT), Inside Contact Diameter=2.5mm, Manufacturer URL=http://www.cui.com/, Mounting Angle=Right, Mounting Style=ThroughHole, Mounting Technology=ThroughHole, Outside Contact Diameter=6.5mm, Package Reference=PJ-102B, Packaging=Bulk, Product=Jacks, Product Category=DCPowerConnectors, RoHS=True, Termination Style=ThroughHole
J2: library part CMP-245163-000002-1, "CONN USB 2.0 TYPE-C R/A SMT", Current Rating=3/4.25/1.25/0.25A, Manufacturer=GCT, Package=0, Temperature="-40°C to +85°C", Temperature Range High=+85°C, Temperature Range Low=-40°C, Voltage Rating=20V, Automotive=No, Category=Conn, ComponentLink2Description=Datasheet, ComponentLink2URL=https://gct.co/files/drawings/usb4110.pdf, Conn Orientation="Right Angle", Contact Material=Gold,Nickel, Device Class L1=Connectors, Device Class L2="USB Connectors", Device Class L3=unset, Digikey Description="CONN USB 2.0 TYPE-C R/A SMT", Height=3.46mm, Is Female=yes, Lead Free=Yes, Manufacturer Part Number=USB4110-GF-A, Number Of Contacts=16, Octopart=https://octopart.com/usb4110-gf-a-gct-103941985, RoHS=TRUE, Shielding=true, Standoff Height=0.1mm, Usb Standard="USB 2.0"
LED1 LED2: library part CMP-1426-00015-1, "SMD mono-color Chip LED, WL-SMCW, Blue", Color=Blue, Manufacturer="Wuerth Elektronik", ComponentLink1Description="Manufacturer URL", ComponentLink1URL=http://www.we-online.com, ComponentLink2Description=Datasheet, ComponentLink2URL=http://katalog.we-online.com/led/datasheet/150120BS75000.pdf, PackageReference=1206_A, PartNumber=150120BS75000
P1 P2 P3 P4 P5 P6 P7 P8 P9: library part "Header 4X2H", "Header, 4-Pin, Dual row, Right Angle", LatestRevisionDate=17-Jul-2002, LatestRevisionNote="Re-released for DXP Platform.", Publisher="Altium Limited"
P10: library part CMP-2000-05416-1, "Male Header, Pitch 2.54 mm, 2 x 5 Position, Height 9.85 mm, Tail Length 3.05 mm, RoHS, Tube", Color=Black, Manufacturer="TE Connectivity", Standard Package=125, 3D Model=5103308-1.pdf, Catalog Drawings=LowProfileShroudedStraight, Category=Connectors,Interconnects, Connector Type=Header,Shrouded, Contact Finish=GoldorGold-Palladium, Contact Finish Thickness=15µin(0.38µm), Contact Mating Length="0.240\"(6.10mm)", Contact Type=MalePin, Datasheet URL=http://www.onlinecomponents.com/productFiles/mf-AMP/eng_cat_889409_0699_96_.pdf, Datasheet Version=Apr-12, Dynamic Catalog=AMP-LatchSeries, Family=RectangularConnectors-Headers,MalePins, Featured Product=AMP-LATCHRibbonCableConnectors, Manufacturer URL=http://www.te.com/, Mating Products="1658624-1-ND / -CONNRCPT10POSPOLARGOLD / 1658527-4-ND / -CONNRCPT10POS.100W/STRRELF / 1658527-3-ND / -CONNRCPT10POS.100622SERIES / 1658526-3-ND / -CONNRCPT10POSVERTGOLD / 1658526-5-ND / -609-1041LFFEMSOCKT,LEADFREE / 1658526-4-ND / -609-1030LFFEMSOCKT,LEADFREE / ASC10B-ND / -CONNIDCSOCKET10POSGOLD / ASC10H-ND / -CONNIDCSOCKET10POS15GOLD / AKC10B-ND / -CONNIDCSKT10POSW/POLGOLD / AKC10H-ND / -CONNIDCSKT10POSW/POL15GOLD / More...", Mounting Type=ThroughHole, Number of Positions=10, Number of Positions Loaded=All, Number of Rows=2, Other Names=A33159, Packaging=Tube, Pitch="0.100\"(2.54mm)", RoHS Information=5103308-1StatementofCompliance, Row Spacing="0.100\"(2.54mm)", Series=AMP-Latch, Termination=Solder
P11: "Header, 2-Pin", LatestRevisionDate=17-Jul-2002, LatestRevisionNote="Re-released for DXP Platform.", Publisher="Altium Limited"
Q1 Q3 Q5 Q7 Q9 Q11 Q13 Q15 Q17: "P-Channel MOSFET", LatestRevisionDate=17-Jul-2002, LatestRevisionNote="Re-released for DXP Platform.", PackageDescription="TO, Flat Index; 3 In-Line, Axial Leads; Body Dia. 4.6mm; Lead Dia. 0.5 mm (max)", PackageReference=E3, PackageVersion=1995/1996, Published=8-Jun-2000, Publisher="Altium Limited"
Q2 Q4 Q6 Q8 Q10 Q12 Q14 Q16: "NPN Bipolar Transistor", Code_JEDEC=TO-226-AA, LatestRevisionDate=17-Jul-2002, LatestRevisionNote="Re-released for DXP Platform.", PackageDescription="TO, Flat Index; 3 In-Line, Axial Leads; Body Dia. 4.8mm; Leads 0.55 x 0.51 mm (max)", PackageReference=TO-226-AA, Published=8-Jun-2000, Publisher="Altium Limited"
R1 R2 R3 R4 R5 R6 R7 R8 R9 R10 R11 R12 R13 R14 R15 R16 R17 R18 R19 R20 R23: "Resistor", LatestRevisionDate=29-May-2009, LatestRevisionNote="IPC-7351 Footprint Added.", PackageDescription="Chip Resistor", PackageReference=J1-0603, Published=8-Jun-2000, Publisher="Altium Limited"
R21 R22 R24 R25 R27 R28 R30: library part Res3_2, "Resistor", LCSC Part #=C25804, LatestRevisionDate=29-May-2009, LatestRevisionNote="IPC-7351 Footprint Added.", PackageDescription="Chip Resistor", PackageReference=J1-0603, Published=8-Jun-2000, Publisher="Altium Limited"
U1 U2 U3 U4: "LED Driver IC 16 Output Linear Shift Register Analog Dimming 90mA 24-QSOP", Package="QSOP-24 STMicroelectronics", Availability=Unavailable, MF=STMicroelectronics, MP=STP16CPC26PTR, Price=None, SnapEDA_Link=https://www.snapeda.com/parts/STP16CPC26PTR/STMicroelectronics/view-part/314081/?ref=snap
U5: "Linear Voltage Regulator IC 1 Output 1A SOT-223", Package="SOT-223 Diodes Inc.", Availability=Unavailable, MF="Diodes Inc.", MP=AZ1117EH-3.3TRG1, Price=None, SnapEDA_Link=https://www.snapeda.com/parts/AZ1117EH-3.3TRG1/Diodes%20Inc./view-part/482930/?ref=snap
U6: library part CMP-0304-00142-2, "ARM Cortex-M0 32-bit MCU, 32 KB Flash, 6 KB Internal RAM, 37 I/Os, 48-Pin LQFP, -40 to 85 degC, Tray", I/Os (High Current)=37, Manufacturer=STMicroelectronics, Operating Frequency(F) (Processor speed) (MHz)=48, Package Description="48-Pin Low Profile Quad Flat Package, Body 7 x 7 mm, Pitch 0.5 mm", Package Reference=LQFP48, Supply Voltage(Vcc) min (V)=2.4, ComponentLink1Description="Manufacturer URL", ComponentLink1URL=http://www.st.com/, ComponentLink2Description=Datasheet, ComponentLink2URL=http://www.st.com/st-web-ui/static/active/en/resource/technical/document/datasheet/DM00141386.pdf, Core="ARM Cortex-M0", DatasheetVersion="Rev. 3", FLASH Size (Prog) (kB)=32, Internal RAM Size (kB)=6, Mounting Technology="Surface Mount", Packing=Tray, PartNumber=STM32F070C6T6
X1: library part CMP-003-00015-1, "Ceramic SMD Crystal, 12 MHz, +/- 20 ppm, 18 pF, -20 to 70 degC, 4-Pin SMD, RoHS, Tape and Reel", Case/Package=CSMD, Frequency=12MHz, Frequency Tolerance=20ppm, LCSC Part #=C9006, Load Capacitance=18pF, Manufacturer=Abracon, Max Operating Temperature=70°C, Min Operating Temperature=-20°C, Package Description="4-Pin Surface Mount Device, Body 5 x 3.2 mm", Package Quantity=1000, Package Reference=ABM3B, Resistance=70Ohm, Component Type="Crystals & Oscillators", Datasheet URL=http://www.abracon.com/Resonators/abm3b.pdf, Datasheet Version=Aug-15, ESR=70, Manufacturer Part Number=ABM3B-12.000MHZ-B2-T, Manufacturer URL=http://www.abracon.com/, Mounting Technology=SM, Packaging=TapeandReel, Pins=4, RoHS Compliant=True, Tolerance=20ppm

## Free pads (board coordinates)
  round 216.54 hole 125.98: 9(275.59,2874.02) 9(984.25,1023.62) 9(2755.91,1968.5) 9(3110.24,196.85)

## Via types
v1: diameter 17.72, hole 7.87, Top Layer to Bottom Layer, 41 vias
v2: diameter 23.62, hole 11.81, Top Layer to Bottom Layer, 35 vias
v3: diameter 50, hole 28, Top Layer to Bottom Layer, 13 vias
v4: diameter 19.68, hole 11.81, Top Layer to Bottom Layer, 1 vias
v5: diameter 47.24, hole 28, Top Layer to Bottom Layer, 1 vias

## Nets (pads, with @x,y where several pads share a name; then routed paths per layer and width w, separated by ;. In a path a pad name is that pad's centre, name@x,y a point inside that pad or via, vN(x,y) a via of type N, cw(c..) or ccw(c..) an arc to the next point about the centre after c; other vN are vias at no path point)
3.3V: C1.2 C4.2 C5.2 C6.2 C7.2 C8.2 C9.2 C10.2 C11.2 C12.2 C13.2 LED1.2 P10.1 R30.2 U5.2 U5.4 U6.1 U6.9 U6.24 U6.36 U6.48 | length 2250.4
  Top Layer w10: C10.2@1534.01,968.44 C11.2@1593,968.44 1625.72,968.44 1664.98,929.17 1664.98,909.1 1665.82,908.27 U6.1@1687.78,908.27 ; v1(1625,1065.94) 1625,1211.39 R30.2@1626.06,1212.44 ; v1(1655.24,619.17) 1600.36,619.17 C12.2@1600,619.53 1600,650.28 1587.25,663.03 1585.03,663.03 1572,676.06 1572,724.76 1598.03,750.79 C13.2@1600,750.79 U6.9@1687.78,750.79 ; C9.2@1684.72,1072.41 1744.76,1072.41 C8.2@1746.73,1070.44 1749.79,1067.38 U6.48@1749.79,970.28 ; C7.2@1963.27,535.56 C6.2@2027,535.56 ; C7.2@1966.32,539.06 U6.24@1966.32,629.72 ; U6.36@2028.33,908.27 C5.2@2116.44,908.27 C4.2@2116.44,970.28 ; C6.2@2030.06,539.06 2084.06,539.06 v1(2085,540) ; C4.2@2115,971.44 C4.2@2116.3,970.14
  Top Layer w15: v1(1482,995) 1507.52,969.48 1532.97,969.48 C10.2@1534.01,968.44 ; v1(1625,1065.94) 1678.26,1065.94 C9.2@1684.72,1072.41 ; v4(2076,970) 2076.14,970.14 2116.3,970.14 C4.2@2116.44,970.28
  Top Layer w30: LED1.2@166.34,1237.23 290,1237.23 ; v3(290,1170) 290,1237.23 ; v3(290,1300) 290,1237.23 ; U5.2@465.67,995.1 U5.4@465.67,1237.23 ; C1.2@465.67,1355.47 U5.4@465.67,1237.23 ; v3(590,1254) 584.59,1254 567.82,1237.23 U5.4@465.67,1237.23 ; 290,1237.23 U5.4@465.67,1237.23
  other v5: 465,1119
GND: C1.1 C2.2 C3.1 C4.1 C5.1 C6.1 C7.1 C8.1 C9.1 C10.1 C11.1 C12.1 C13.1 C14.1 C15.1 C16.1 D1.2 J1.2 J1.3 J2.A1-B12 J2.B1-A12 Q2.2 Q4.2 Q6.2 Q8.2 Q10.2 Q12.2 Q14.2 Q16.2 Q17.3 R1.1 R2.1 R3.1 R4.1 R21.1 R22.1 R24.1 R25.1 R27.1 R28.1 U1.1 U2.1 U3.1 U4.1 U5.1 U6.8 U6.23 U6.35 U6.47 X1.2 X1.4 | length 248.8
  Top Layer w10: v1(1624,789) 1626.18,789 1644.51,770.67 U6.8@1687.99,770.67
  Top Layer w15: v1(3070,2000) 3070.74,2000 3087.93,1982.81 3116.22,1982.81 R3.1@3122.5,1976.53 ; v3(3085,995) 3122.5,957.5 R4.1@3122.5,941.53 ; R2.1@3215,2215.47 3221.28,2221.75 3246.02,2221.75 3254.26,2230 v1(3255,2230)
  other v2: 2460,210 2700,210 2375,390 2835,405 3045,410 2480,545 1450,805 2240,945 2220,1035 1795,1055 1415,1065 1545,1100 1565,1210 3115,1430 1510,1585 955,1595 955,1825 1510,1825 1500,2070 960,2080 3602.76,2250 2635,2280 1505,2315 1945,2315 955,2330 2020,2375
  other v3: 320,140 215,240 425,240 320,350 375,875 295,995
HS0: R6.2 U6.18 | length 2045.5
  Top Layer w10: v1(1151.57,2204.72) 1170.47,2223.62 R6.2@1170.47,2249.69 ; U6.18@1848.43,629.92 1848.43,812.87 1850.39,814.84 v1(1850.39,816.93)
  Bottom Layer w10: v1(1151.57,2204.72) 1151.57,2005.02 1088.19,1941.63 1088.19,1450.9 1722.16,816.93 v1(1850.39,816.93)
HS1: R8.2 U6.19 | length 1756.6
  Top Layer w10: R8.2@1721.65,2249.69 1723.62,2249.69 1734.37,2238.94 1734.37,2236.98 1958.66,2012.68 v1(1958.66,1043.31) ; U6.19@1868.11,629.92 1870.08,631.89 v1(1870.08,875.98)
  Bottom Layer w10: v1(1870.08,875.98) 1958.66,964.57 v1(1958.66,1043.31)
HS2: R10.2 U6.20 | length 1852.4
  Top Layer w10: v1(1141.73,1968.5) 1157.39,1968.5 1170.47,1981.59 R10.2@1170.47,2013.47 ; U6.20@1887.8,629.92 1887.8,832.83 1892.8,837.83 v1(1892.8,839.92)
  Bottom Layer w10: v1(1141.73,1968.5) 1141.73,1766.28 1103.19,1727.74 1103.19,1478.41 1114.24,1467.36 1515.75,1065.85 1515.75,1044.55 1722.44,837.86 1885.28,837.86 1885.87,838.45 1891.33,838.45 v1(1892.8,839.92)